# Altium PCB USB.PcbDoc
Units mil, origin at the board's own origin, x right, y up, seen from the top; angles counter-clockwise.
Board outline 5000 x 4000 mil, 2 copper layers (Top Layer, Bottom Layer); 19 components, 24 nets, 79 pads, 4 vias.
Unrouted connection lines stored in the file: 1.
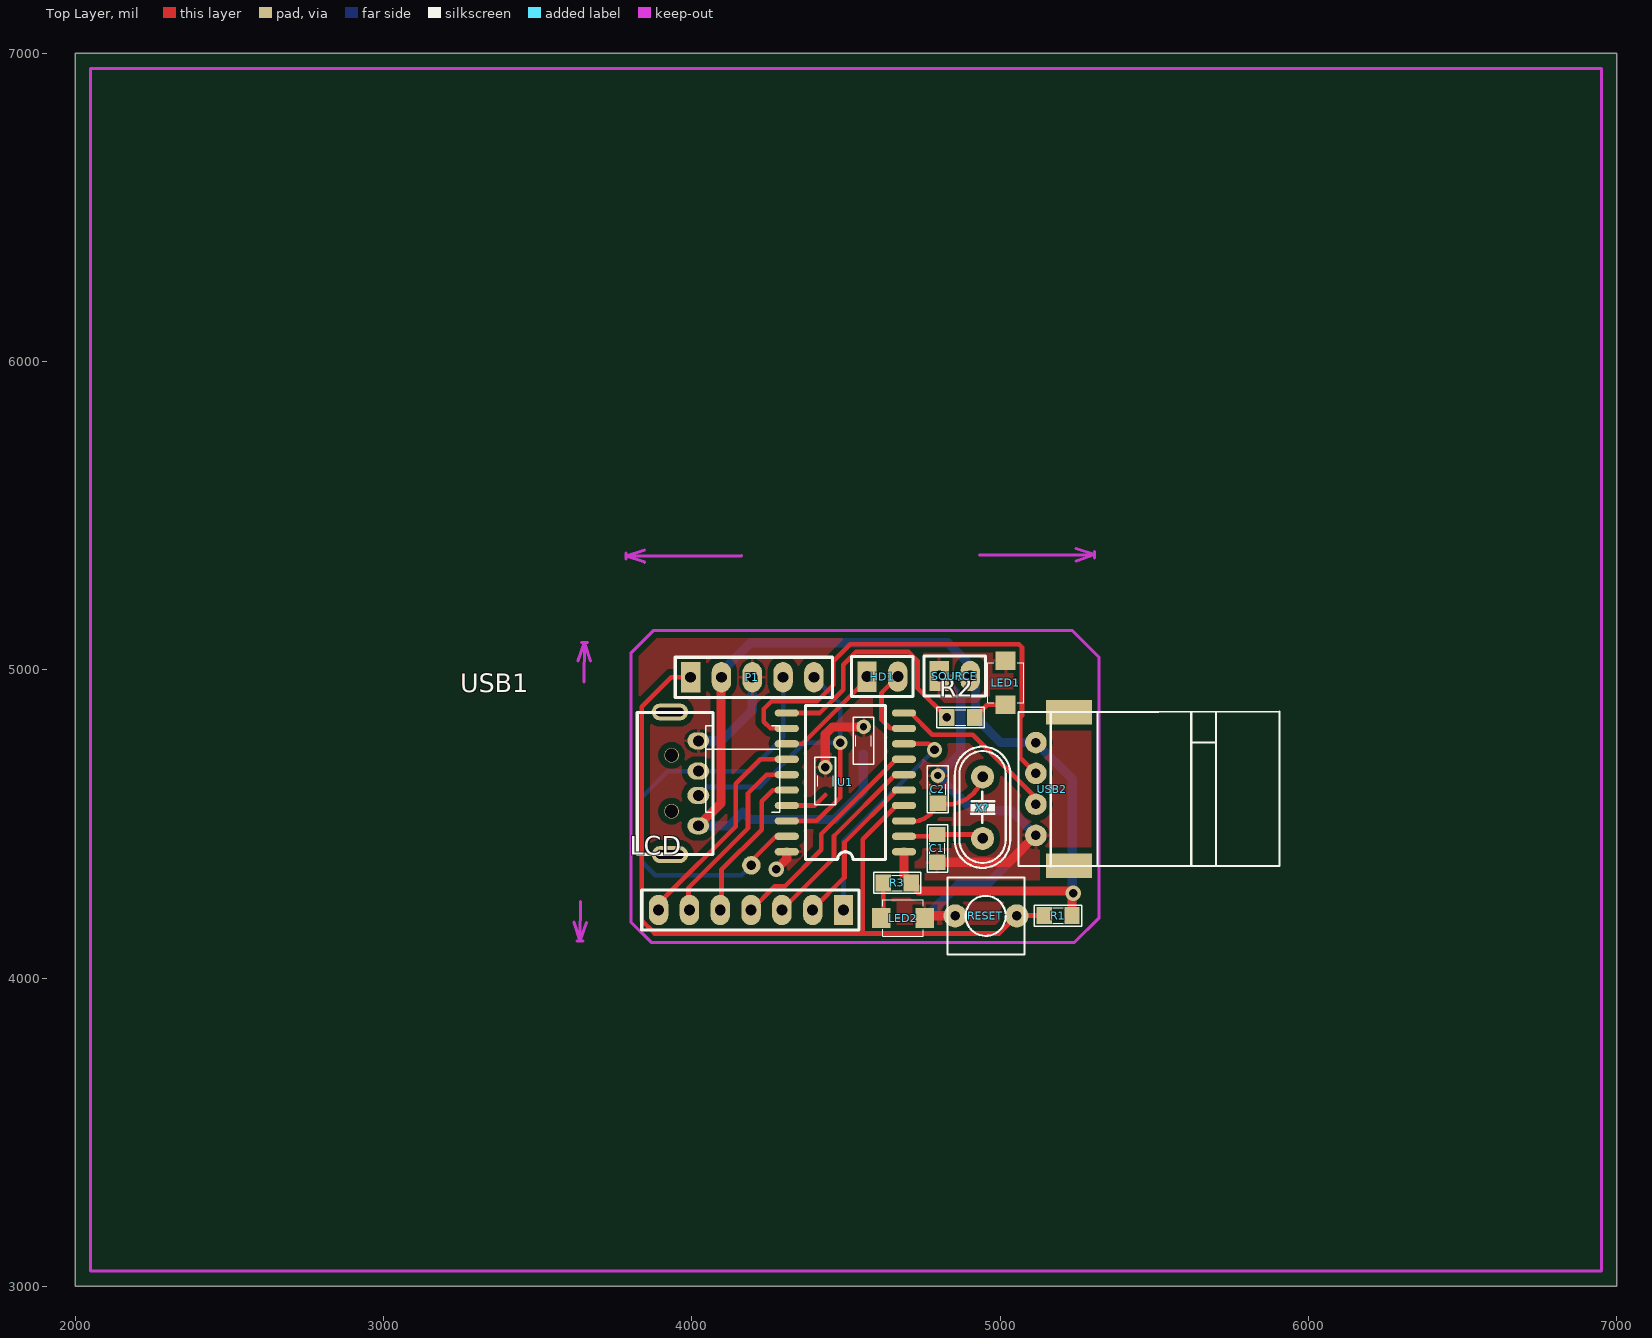
[diagram p0: Top Layer view]
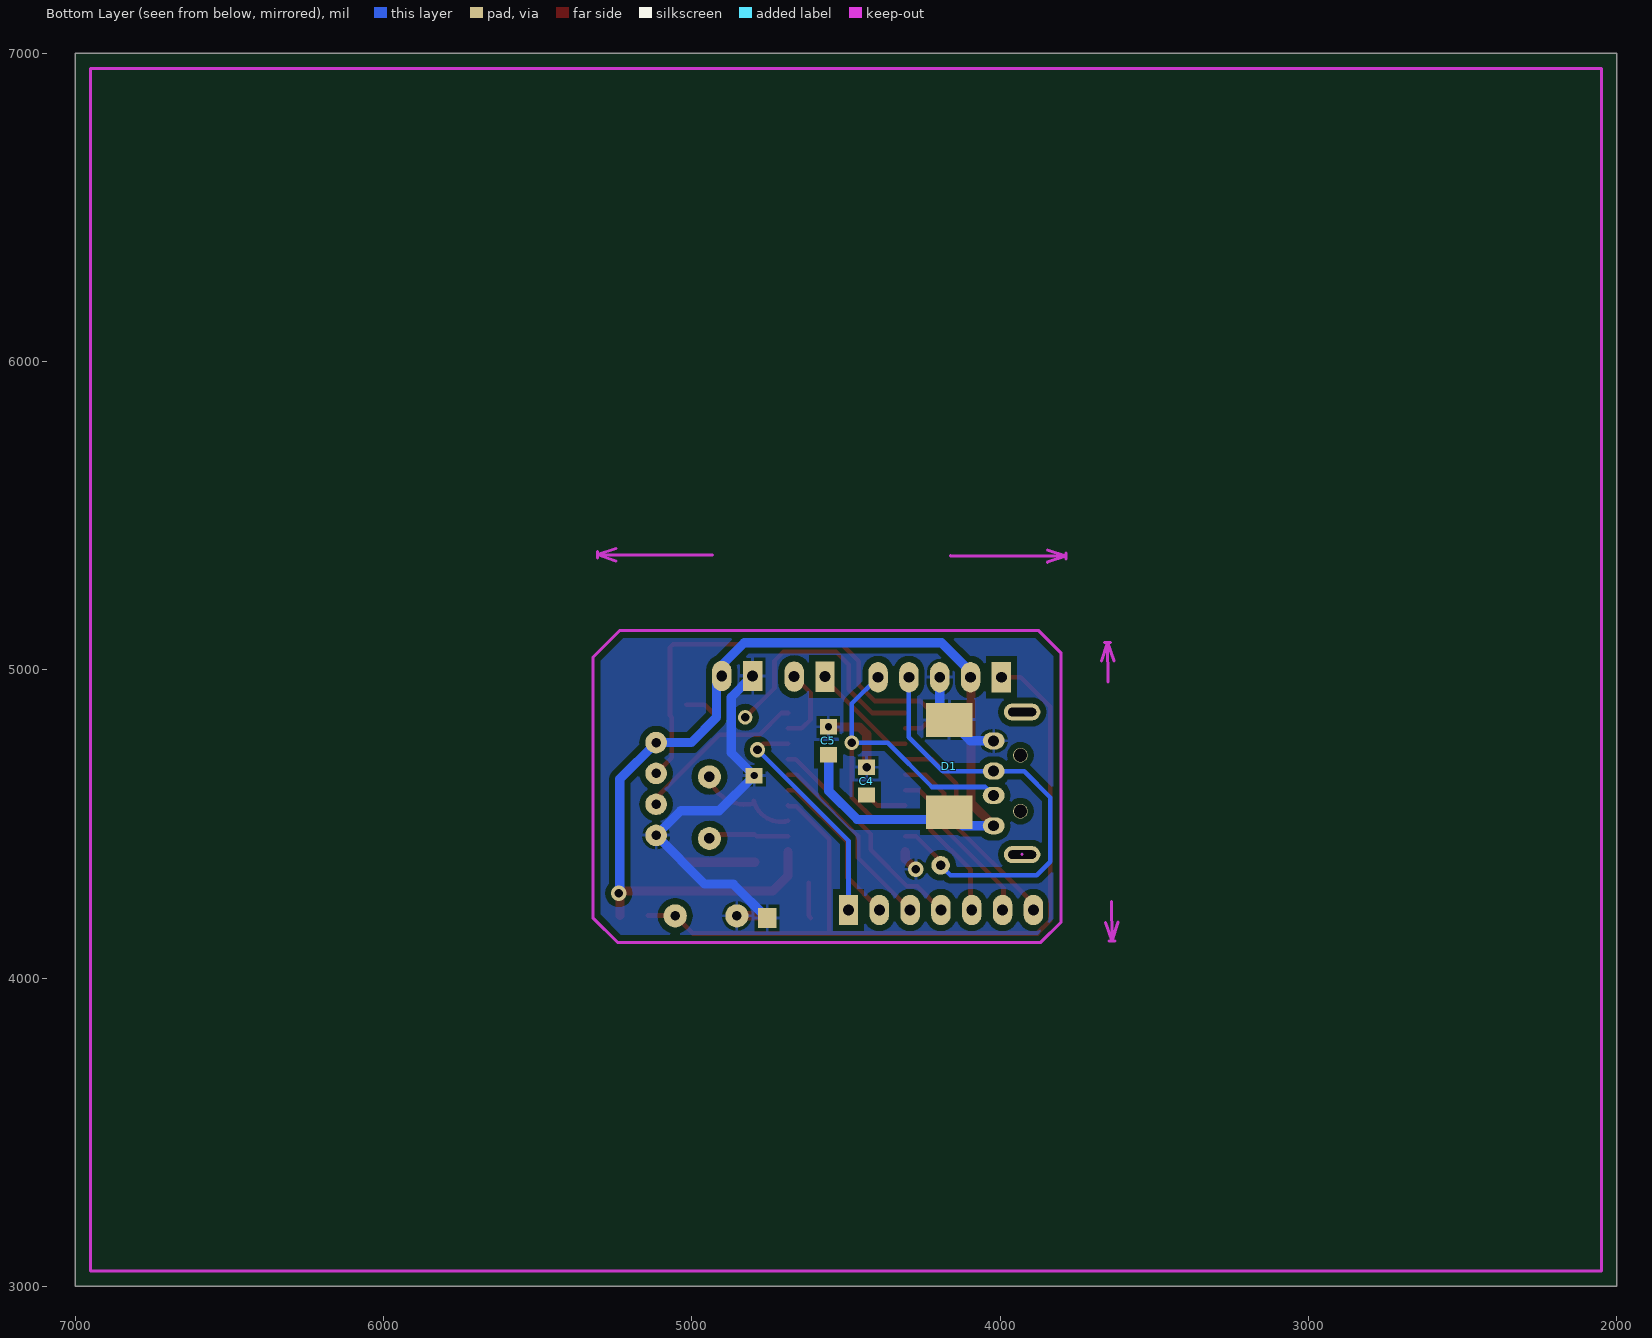
[diagram p1: Bottom Layer view, seen from below]
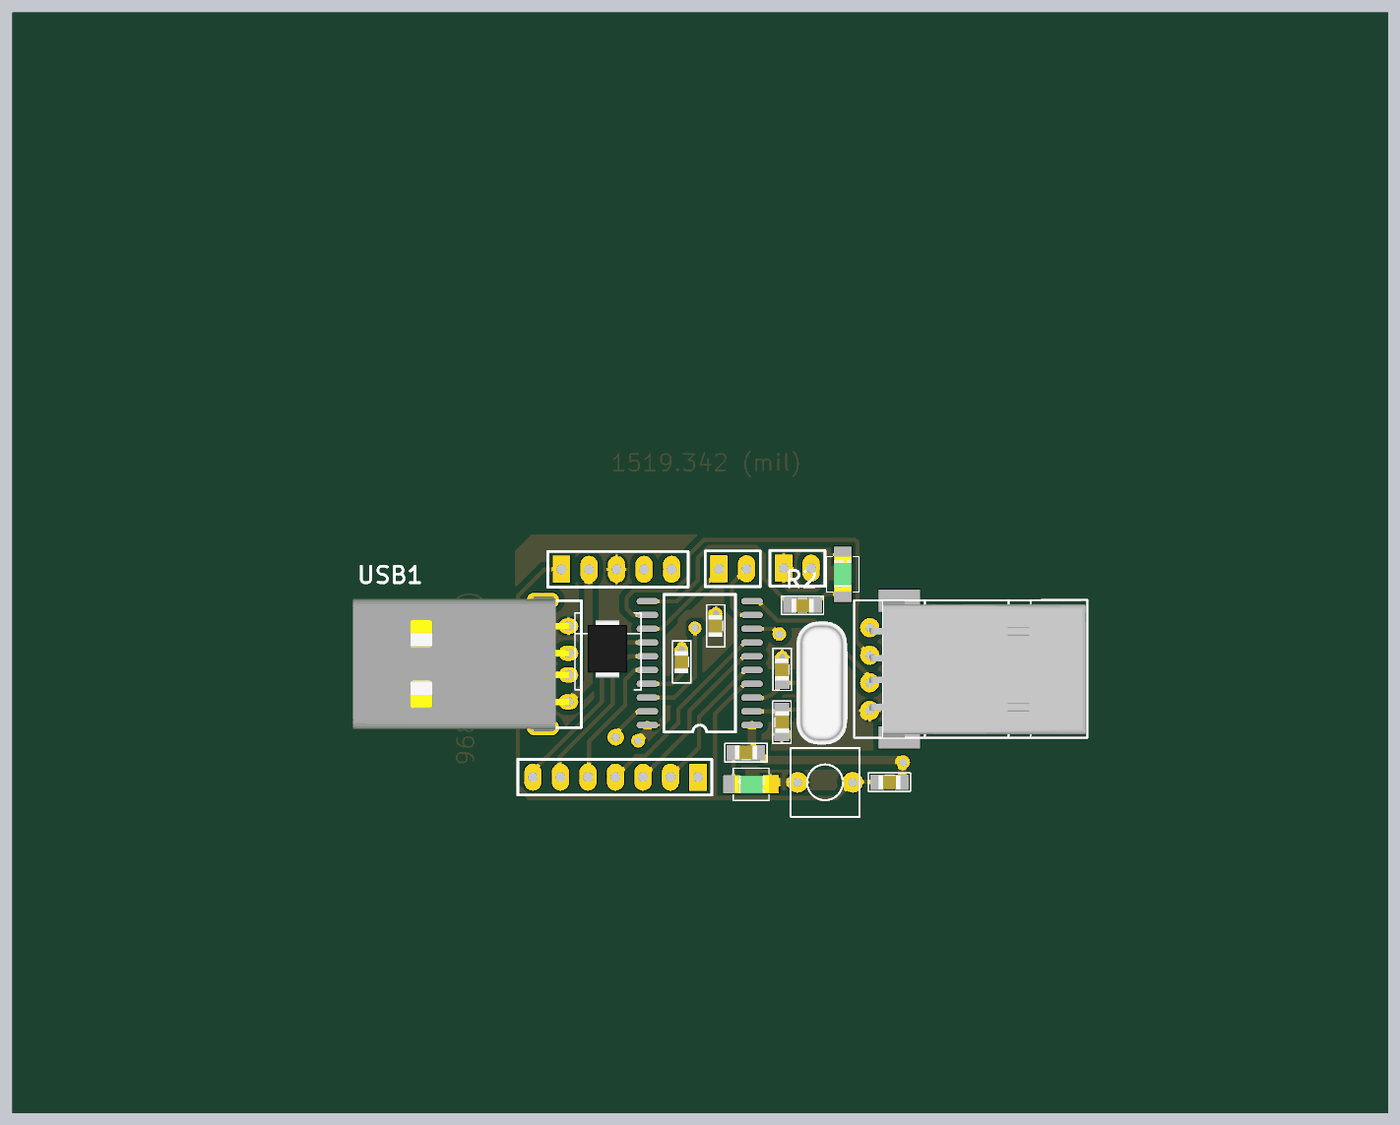
[diagram p2: 3D render of the assembled board from above, using the file's embedded part models]

## Layer stack, top to bottom
Top Layer: signal copper 1.4
Dielectric: core 12.6, FR-4, Dk 4.8
Bottom Layer: signal copper 1.4

## Board outline
2000,3000 7000,3000 7000,7000 2000,7000

## Design rules (kind name [scope] priority, off if disabled: settings)
Clearance Clearance_2 [InNet('GND') vs InNet('GND')] p1: gap=20
Clearance Clearance_1 [All] p2: gap=20
Clearance [InNet('VCC') vs InNet('VCC')] p3: gap=40
PolygonConnect [All] p1: connectstyle=Relief reliefconductorwidth=10 reliefentries=4 polygonreliefangle="90 Angle" airgapwidth=10
RoutingVias [All] p1: holewidth=25 width=40 viastyle="Through Hole" minholewidth=28 minwidth=50 maxholewidth=28 maxwidth=50
SolderMaskExpansion [All] p1: expansion=4
Width GND [InNet('GND')] p1: maxlimit=30 minlimit=30 preferedwidth=30
Width VCC [InNet('VCC')] p2: maxlimit=30 minlimit=30 preferedwidth=30
Width [All] p3: maxlimit=15 minlimit=15 preferedwidth=15
28 further rules are at their usual default settings.

## Classes and differential pairs
component class USB: C1 C2 C4 C5 D1 HD1 LED1 LED2 P1 R1 R2 R3 RESET SOURCE U1 USB1 USB2 X?

## Components (designator, comment, footprint, x,y, rotation, side; value= is the part's Value field where it differs from the comment)
C1 "33pF" SM-0805#1 4796,4421 r90 top
C2 "33pF" SM-0805#2 4798,4612 r270 top
C4 "103" SM-0805#3 4433,4639 r270 top
C5 "103" SM-0805#3 4557,4770 r270 top
D1 "1N4007" SM-DIODE 4165,4688 r270 top
HD1 "Header 2" HEADER1x2 4568,4978 r0 top
LCD "Header 7H" HEADER1x7 4492,4221 r180 top
LED1 "LED" SM-LED-Red#1 5018,4887 r90 top
LED2 "LED" SM-LED-Red#2 4614,4195 r0 top
P1 "MACH NAP" HEADER1x5 3996,4976 r0 top
R1 "10K" SM-0805#1 5188,4203 r0 top
R2 "1k" SM-0805#1 4872,4846 r0 top
R3 "1k" SM-0805#1 4666,4309 r180 top
RESET "SW" SW2 4854,4202 r0 top
SOURCE "Header 2" HEADER1x2 4803,4980 r0 top
U1 "PIC18F14K50-I/P" SOP-20 4688,4410 r180 top
USB1 "USB-S" USB-A-RA 4018,4632 r270 top
USB2 "USB-S" USB-A 5116,4764 r270 top
X? "4Mhz" XT2 4943,4553 r270 top

## Footprints (in the part's own frame and the unit in brackets; to place one, negate y for a bottom-side part, rotate by r counter-clockwise, add the part's x,y. Pads: shape width x height; smd on the part's side, far side on the other; paste and mask are expansions set on the pad)
HEADER1x2 [mm]
  rect 1.6x2.5 hole 0.9: 1(0,0)
  oval 1.6x2.5 hole 0.9: 2(2.54,0)
  silkscreen extent -1.27,-1.65 3.81,1.65
HEADER1x5 [mm]
  rect 1.6x2.5 hole 0.9: 1(0,0)
  oval 1.6x2.5 hole 0.9: 2(2.54,0) 3(5.08,0) 4(7.62,0) 5(10.16,0)
  silkscreen extent -1.27,-1.65 11.68,1.65
HEADER1x7 [mm]
  rect 1.6x2.5 hole 0.9: 1(0,0)
  oval 1.6x2.5 hole 0.9: 2(2.54,0) 3(5.08,0) 4(7.62,0) 5(10.16,0) 6(12.7,0) 7(15.24,0)
  silkscreen extent -1.27,-1.65 16.63,1.65
SM-0805#1 [mil] "Compoment SMD 80x50mil"
  rect 50x55 smd: 1(-45,0) 2(45,0)
  silkscreen extent -77,-34 76,33, body extent -40,-27 40,23, height 24
SM-0805#2 [mil] "Compoment SMD 80x50mil"
  rect 50x55 smd far side: 1(-45,0)
  rect 50x55 smd: 2(45,0)
  silkscreen extent -77,-34 76,33, body extent -40,-27 40,23, height 24
SM-0805#3 [mil] "Compoment SMD 80x50mil"
  rect 50x55 smd far side: 1(-45,0) 2(45,0)
  silkscreen extent -77,-34 76,33, body extent -40,-27 40,23, height 24
SM-DIODE [mil] "Magnetic-Core Inductor with Winding Polarity Marking; 2 Leads"
  rect 110x150 smd far side: 1(-150,0) 2(150,0)
  silkscreen extent -130,-120 150,120, body extent -103,-73 105,69, height 96
SM-LED-Red#1 [mil]
  rect 60x65 smd: 1(0,0) 2(142,0)
  silkscreen extent 6,-59 136,59, body extent 10,-32 136,31, height 44
SM-LED-Red#2 [mil]
  rect 60x65 smd: 1(0,0)
  rect 60x65 all layers, no hole: 2(142,0)
  silkscreen extent 6,-59 136,59, body extent 10,-32 136,31, height 44
SOP-20 [mm]
  oval 2x0.6 smd: 1(0,0) 2(0,-1.27) 3(0,-2.54) 4(0,-3.81) 5(0,-5.08) 6(0,-6.35) 7(0,-7.62) 8(0,-8.89) 9(0,-10.16) 10(0,-11.43) 11(9.652,-11.43) 12(9.652,-10.16) 13(9.652,-8.89) 14(9.652,-7.62) 15(9.652,-6.35) 16(9.652,-5.08) 17(9.652,-3.81) 18(9.652,-2.54) 19(9.652,-1.27) 20(9.652,0)
  silkscreen extent 1.52,-12.06 8.13,0.64
SW2 [mil] "SW button 2pin, 250x 250 mil"
  round 75 hole 31: 1(0,0) 2(200,0)
  silkscreen extent -25,-125 225,125
USB-A [mil]
  round 70 hole 31: 1(0,0) 2(100,0) 3(200,0) 4(301,0)
  rect 80x150 smd: 5(-98,107) 6(399,107)
  silkscreen extent -101,-57 401,790, body extent -97,0 399,784, height 177
USB-A-RA [mm] "USB Type A"
  oval 1.4x1.8 hole 0.9: 1(3.5,0.08) 2(1,0.08) 3(-1,0.08) 4(-3.5,0.08)
  oval 1.4x3 hole 0.7 slot 2.3 at 90 deg: HOLE(-5.875,-2.27) HOLE(5.875,-2.27)
  round 1.2 hole 1.1: HOLE(-2.3,-2.13) HOLE(2.3,-2.13)
  Keep-Out Layer lines w0.254: 5.875,-2.27 5.842,-2.27
  silkscreen extent -5.84,-4.95 5.87,1.27, body extent -6.25,-19.8 6.25,0.23, height 2.18
XT2 [mil] "Footpin for Crystal 2 pin"
  round 75 hole 34: 1(-100,0) 2(100,0)
  silkscreen extent -198,-90 195,90, body extent -233,-93 213,90, height 138

## Part data
C1 C2 C4 C5: library part CM, "Cap SMD"
D1: library part D1A, "Diode 1A"
HD1 SOURCE: library part Hed2, "Header 2 (Green)"
LCD: "Header, 7-Pin, Right Angle"
LED1 LED2: "LED Single colour Green and Red"
P1: library part "Header 5H", "Header, 5-Pin, Right Angle"
R1 R2 R3: library part R, "Resistor 1/4W"
RESET: library part SW2, "Switch button 2 pin"
U1: "USB Flash Microcontroller with nanoWatt XLP Technology, 20-pin PDIP, Industrial Temperature"
USB1 USB2: library part USB_S, "USB connector"
X?: library part XT2, "Crystal For all Crystal 2pin."

## Free pads (board coordinates)
  round 47.24 hole 23.62: 1(4798,4657) 6(4557,4815)
  round 47.24 hole 27.56: 2(4433,4684) 4(4827,4846)
  round 60 hole 30: 3(4193,4366)

## Via types
v1: diameter 50, hole 28, Top Layer to Bottom Layer, 2 vias
v2: diameter 50, hole 27.56, Top Layer to Bottom Layer, 1 vias
v3: diameter 47.24, hole 27.56, Top Layer to Bottom Layer, 1 vias

## Nets (pads, with @x,y where several pads share a name; then routed paths per layer and width w, separated by ;. In a path a pad name is that pad's centre, name@x,y a point inside that pad or via, vN(x,y) a via of type N, cw(c..) or ccw(c..) an arc to the next point about the centre after c; other vN are vias at no path point)
D4: LCD.4 U1.7 | length 728.7
  Top Layer w15: LCD.4 4269,4298 4302,4298 4420,4416 4420,4467.47 4662.53,4710 U1.7
D5: LCD.3 U1.6 | length 619.4
  Top Layer w15: LCD.3 4461,4390 4461,4461 4660,4660 U1.6
D6: LCD.2 U1.5 | length 525.1
  Top Layer w15: LCD.2 4392,4223.63 4495,4326.63 4495,4440 4665,4610 U1.5
D7: LCD.1 U1.8 | length 749.1
  Top Layer w15: U1.8 4768,4760 v1(4787,4741)
  Bottom Layer w15: LCD.1 4492,4446 v1(4787,4741)
D+: 
D+/PGD: P1.4 pad.3 U1.19 USB1.3 | length 1492.4
  Top Layer w15: pad.3 4193,4380 4273,4460 U1.19
  Bottom Layer w15: pad.3 4161,4334 3881,4334 3837,4378 3837,4586 3922.37,4671.37 USB1.3 4186.37,4671.37 4296,4781 P1.4
D-: 
D-/PGC: P1.5 U1.18 USB1.2 | length 1185.1
  Top Layer w15: U1.18 4405,4510 4481,4586 v3(4481,4763) ; P1.5@4396,4951 P1.5
  Bottom Layer w15: USB1.2 4048.52,4620 4221,4620 4364,4763 v3(4481,4763) 4481,4891 P1.5
EN: LCD.7 U1.14 | length 659.6
  Top Layer w15: 3914,4264 4142,4492 4142,4630 4222,4710 U1.14
GND: C1.1 C2.1 C4.1 C5.1 D1.1 LED1.2 LED2.2 P1.3 pad.1 pad.2 pad.6 RESET.1 SOURCE.1 U1.20 USB1.4 USB2.4 | length 2396.4
  Top Layer w30: v1(4274,4353) 4308,4387 U1.20 ; pad.2@4438.38,4689.38 pad.2 4433,4790.87 4457.13,4815 pad.6 ; LED2.2 4763,4202 RESET.1 ; C1.1 5029,4376 USB2.4 ; SOURCE.1 SOURCE.1@4803,5007
  Bottom Layer w30: USB1.4 4096.8,4769.8 D1.1 4196,4869 P1.3 P1.3@4183,4963 ; LED2.2 4866,4305 4958,4305 USB2.4 5036,4543 4912,4543 pad.1 4872,4731 4872,4911 SOURCE.1
LED: pad.4 R2.1 U1.11 | length 787.8
  Top Layer w15: U1.11 4415,4860 4491,4936 4491,5017 4532,5058 4703,5058 4732,5029 4732,4941 R2.1
MCLR: P1.1 R1.1 RESET.2 U1.4 | length 2721.7
  Top Layer w15: P1.1 3933,4976 3837,4880 3837,4187 3879,4145 4997,4145 RESET.2 5055,4203 R1.1 ; 4556,4148.5 4554,4150.5 4554,4451 4661,4558 4686,4558 U1.4
NetC4_2: C4.2 U1.17 | length 139.1
  Top Layer w15: U1.17 4399,4560 4433,4594
NetLED1_1: LED1.1 R2.2 | length 118
  Top Layer w15: R2.2 4958,4887 LED1.1
NetLED2_1: LED2.1 R3.2 | length 116.9
  Top Layer w15: LED2.1 4621,4202 R3.2
OSC1: C1.2 U1.2 X?.2 | length 254.4
  Top Layer w15: U1.2 C1.2@4790,4460 ; C1.2 4930,4466 X?.2
OSC2: C2.2 U1.3 X?.1 | length 330.1
  Top Layer w15: U1.3 ccw(c4711,4598) C2.2@4799,4575 ; C2.2 ccw(c4827.5,4682.5) X?.1
RB4: HD1.1 U1.13 | length 355.6
  Top Layer w15: U1.13 4359,4760 4568,4969 HD1.1
RC7: HD1.2 U1.9 | length 246
  Top Layer w15: HD1.2 4615,4925 4615,4839 4644,4810 U1.9
RS: LCD.5 U1.16 | length 460.2
  Top Layer w15: LCD.5@4096,4264 4096,4351 4227,4482 4227,4574 4263,4610 U1.16
RW: LCD.6 U1.15 | length 566.8
  Top Layer w15: LCD.6@3989,4264 3989,4293 4182,4486 4182,4600 4242,4660 U1.15
RX: U1.12 USB2.2 | length 1531.5
  Top Layer w15: U1.12 4255,4810 4233,4832 4233,4873 4259,4899 4407,4899 4459,4951 4459,5028 4514,5083 5061,5083 5071,5073 5071,4851.5 5065.5,4846 5065.5,4714.5 USB2.2
TX: U1.10 USB2.3 | length 562.9
  Top Layer w15: U1.10 4710,4860 4780,4790 4911,4790 5116,4585 USB2.3
VCC: C5.2 D1.2 P1.2 R1.2 R3.1 SOURCE.2 U1.1 USB1.1 USB2.1 | length 3790.3
  Top Layer w30: USB1.1 4094.5,4567.56 4094.5,4974.5 P1.2 ; U1.1 4688,4332 R3.1 4737,4283 5229,4283 v2(5237,4275) ; R1.2 v2@5233,4271
  Bottom Layer w30: USB1.1 4121.2,4494.2 D1.2 4188,4515 4464,4515 4556,4607 C5.2@4556,4726 ; P1.2 4096,4994 4190,5088 4830,5088 4903,5015 SOURCE.2 4920,4963 4920,4846 5002,4764 USB2.1 5234,4646 5234,4278 v2(5237,4275)
pads on no net: USB1.HOLE USB2.5 USB2.6

## Polygon pours and split planes (outlines as drawn)
GND on Top Layer "Top Layer-No Net" (solid, remove dead copper, pour order 8): 3912,5138 3927,5123 5238,5123 5238,5112 5319,5031 5321,5029 5321,4196 5241,4116 3868,4116 3802,4182 3802,5054 3876,5128
GND on Bottom Layer "Top Layer-No Net" (solid, remove dead copper, pour order 10): 3876,5128 3881,5123 5238,5123 5321,5040 5321,4196 5316,4196 5249,4129 5236,4116 3868,4116 3802,4182 3802,5054 3876,5128

## Keep-outs
Keep-Out Layer:
  lines w10: 3617.93,4181.3 3637,4121 ; 3627,4121.15 3647,4120.85 ; 3631.07,5029.32 3652,5089 ; 3638.99,4249.15 3637,4121 ; 3642,5089.15 3662,5088.85 ; 3650.01,4960.85 3652,5089 ; 3657.93,4180.68 3637,4121 ; 3671.07,5028.7 3652,5089 ; 3786.97,5379 3787.03,5359 ; 3846.94,5389.18 3787,5369 ; 3847.06,5349.18 3787,5369 ; 4160.79,5370.1 3787,5369 ; 4932.55,5372.36 5306.34,5373.46 ; 5246.28,5393.28 5306.34,5373.46 ; 5246.39,5353.28 5306.34,5373.46 ; 5306.31,5383.46 5306.36,5363.46 ; 2050,3050 2050,6950 6950,6950 6950,3050 2050,3050 ; 3802,4182 3802,5054 3876,5128 5233,5128 5321,5040 5321,4196 5241,4116 3868,4116 3802,4182
  text "1519.342 (mil)" at 4170.89,5334.14 h60 r0.17
  text "968.116 (mil)" at 3675.13,4258.59 h60 r89.11

## Dimensions
2050,3050 to 2050,6950 on Mechanical 1
2050,3050 to 6950,3050 on Mechanical 1